# EAGLE board Ds3231Shield (EAGLE 7.4.0)
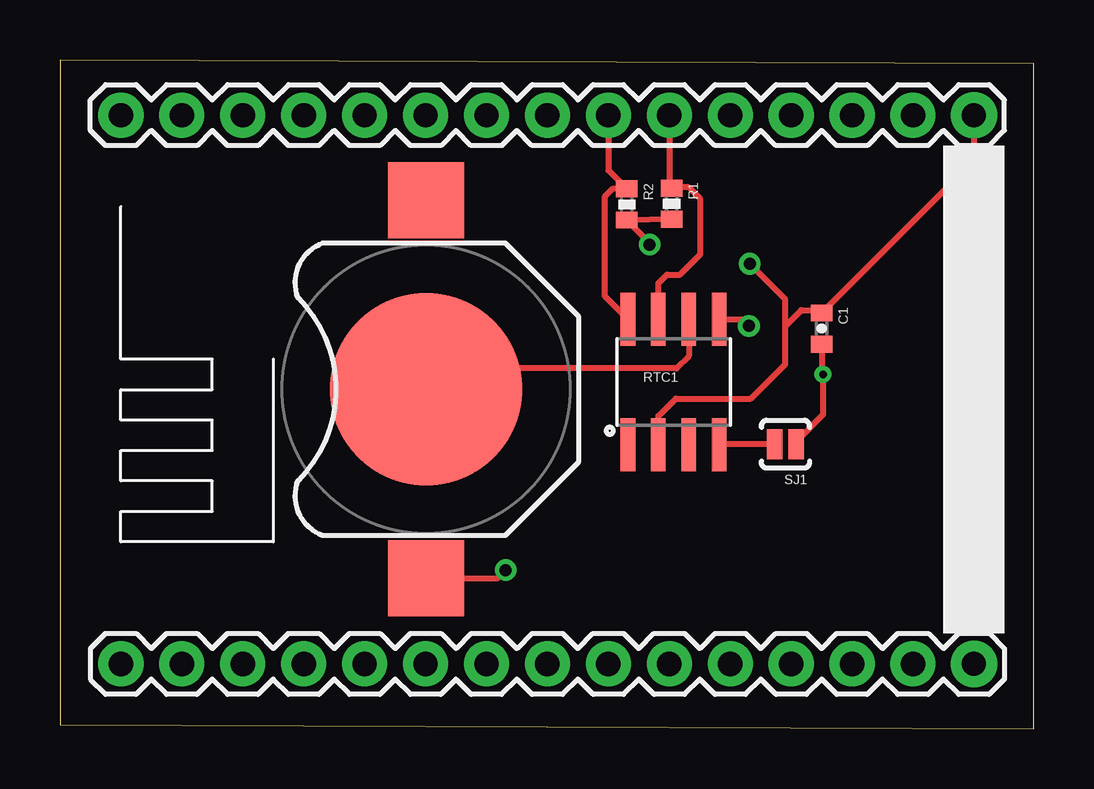
[diagram p0: board, top side]
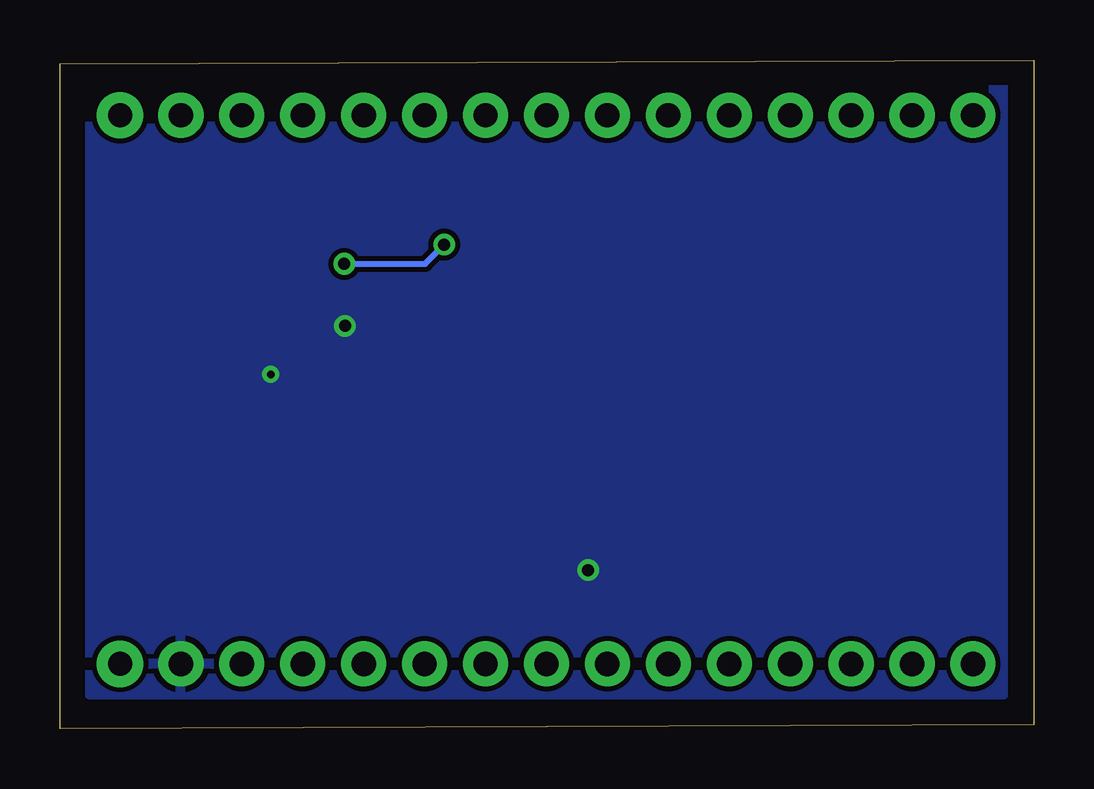
[diagram p1: board, bottom side, seen from below]

Size 40.6 x 27.86 mm. Coordinates in mm from the lower left corner, seen from the top.
Outline: 0,0.16 40.6,0 40.6,27.7 0,27.86 0,0.16
Copper layers (1*16): Top 0.035mm / dielectric 1.5mm / Bottom 0.035mm
Design rules "default": minimum track width 10mil, minimum drill 24mil, track to track 8mil, track to pad 8mil, pad to pad 8mil, via to via 8mil, smd to smd 8mil, copper to edge 40mil, drill to drill 8mil, minimum pad ring 10mil, minimum via ring 8mil, stop-mask expansion 4mil, vias tented up to drill 0mil, thermal gap 10mil

## Footprints (pad centres in the part's own frame; a part is rotated, then mirrored left to right if it is on the bottom)
BATTCON_12MM = smd 8 x 8: GND 0,0 | smd 3.175 x 3.175: PWR@1 -7.874,0; PWR@2 7.874,0
0402-CAP = smd 0.7 x 0.9: 1 -0.65,0; 2 0.65,0
0402-RES = smd 0.7 x 0.9: 1 -0.65,0; 2 0.65,0
SOIC8 = smd 0.61 x 2.21: 1 -1.905,-2.616; 2 -0.635,-2.616; 3 0.635,-2.616; 4 1.905,-2.616; 5 1.905,2.616; 6 0.635,2.616; 7 -0.635,2.616; 8 -1.905,2.616
SJ_2S-NO = smd 0.635 x 1.27: 1 -0.45,0; 2 0.45,0
NERDUINO_STACK = drill 1.016 pad 1.88: 1 -17.78,-5.08; 2 -15.24,-5.08; 3 -12.7,-5.08; 4 -10.16,-5.08; 5 -7.62,-5.08; 6 -5.08,-5.08; 7 -2.54,-5.08; 8 0,-5.08; 9 2.54,-5.08; 10 5.08,-5.08; 11 7.62,-5.08; 12 10.16,-5.08; 13 12.7,-5.08; 14 15.24,-5.08; 17 15.24,17.78; 18 12.7,17.78; 19 10.16,17.78; 20 7.62,17.78; 21 5.08,17.78; 22 2.54,17.78; 23 0,17.78; 24 -2.54,17.78; 25 -5.08,17.78; 26 -7.62,17.78; 27 -10.16,17.78; 28 -12.7,17.78; 29 -15.24,17.78; 30 -17.78,17.78 | drill 1 pad 1.93: 15 17.78,-5.08; 16 17.78,17.78

## Placement (x,y rotation side)
BAT1  [BATTCON_12MM]  15.26,14.14 90 top
C1  0.1uF  [0402-CAP]  31.75,16.67 270 top
R1  4.7k  [0402-RES]  25.5,21.87 270 top
R2  4.7k  [0402-RES]  23.63,21.84 270 top
RTC1  DS3231M  [SOIC8]  25.58,14.44 0 top
SJ1  SOLDERJUMPERNO  [SJ_2S-NO]  30.24,11.85 180 top
U$1  NERDSHIELD  [NERDUINO_STACK]  20.32,7.78 0 top

## Library data of the parts
BAT1 = SparkFun-Electromechanical; PROD_ID: BATT-08044
C1 R1 R2 SJ1 = SparkFun
RTC1 = SparkFun-DigitalIC; PROD_ID: IC-11985
U$1 = NerduinoShieldLib

## Nets
3.3V: C1.1 R1.2 R2.2 RTC1.2 U$1.16
GND: BAT1.PWR@1 C1.2 RTC1.5 SJ1.1 U$1.14
N$1: BAT1.GND RTC1.6
N$2: R2.1 RTC1.8 U$1.22
N$3: R1.1 RTC1.7 U$1.21
N$4: RTC1.4 SJ1.2

## Tracks (layer width: path | path; a pad name or v marks a point on that pad's centre or on a via)
3.3V  (via drill 0.5)
  Top 0.254: U$1.16 38.1,23.67 C1.1 31.63,17.44 30.9,17.44 30.23,16.77 | R1.2 R2.2 24.58,20.24 v24.58,20.17 | RTC1.2 24.95,13.03 25.67,13.75 28.8,13.75 30.23,15.18 30.23,16.77 | 30.23,16.77 30.23,17.89 v28.75,19.37
  Bottom 0.254: v28.75,19.37 25.38,19.37 v24.58,20.17
GND  (via drill 0.3, 0.5)
  Top 0.254: C1.2 31.75,14.82 v31.81,14.76 v31.82,14.75 31.82,13.09 30.69,11.96 SJ1.1 | RTC1.5 28.44,17.06 v28.72,16.78 | BAT1.PWR@1 18.24,6.27 v18.58,6.61
  Bottom 0.254: v31.81,14.76 31.81,14.79 31.66,14.94 | v28.72,16.78 28.72,16.94 | v18.58,6.61 18.67,6.61 18.75,6.53
  pour Bottom: 1.27,26.83 39.37,26.83 39.37,1.43 1.27,1.43
N$1
  Top 0.254: RTC1.6 26.21,15.53 25.7,15.01 16.13,15.01 BAT1.GND
N$2
  Top 0.254: U$1.22 22.86,23.26 R2.1 23.03,22.49 22.7,22.16 22.7,18.03 RTC1.8
N$3
  Top 0.254: U$1.21 25.4,22.62 R1.1 25.53,22.55 26.21,22.55 26.69,22.07 26.69,19.76 25.85,18.92 25.31,18.92 24.95,18.55 RTC1.7
N$4
  Top 0.254: SJ1.2 27.48,11.85 RTC1.4